# Altium PCB pokey-switch-board.PcbDoc
Units mil, origin at the board's own origin, x right, y up, seen from the top; angles counter-clockwise.
Board outline 700 x 2425 mil, 2 copper layers (Top Layer, Bottom Layer), stack 62.8 mil thick; 10 components, 8 nets, 35 pads, 4 vias.
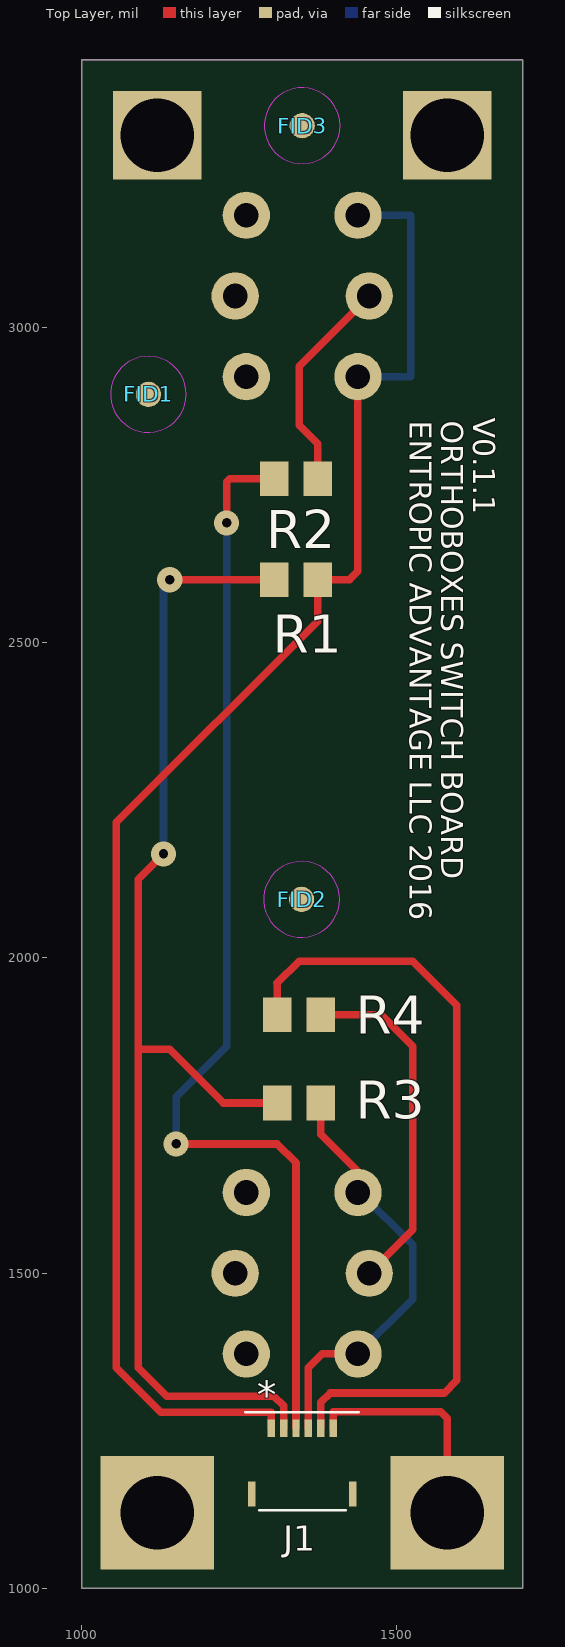
[diagram p0: Top Layer view]
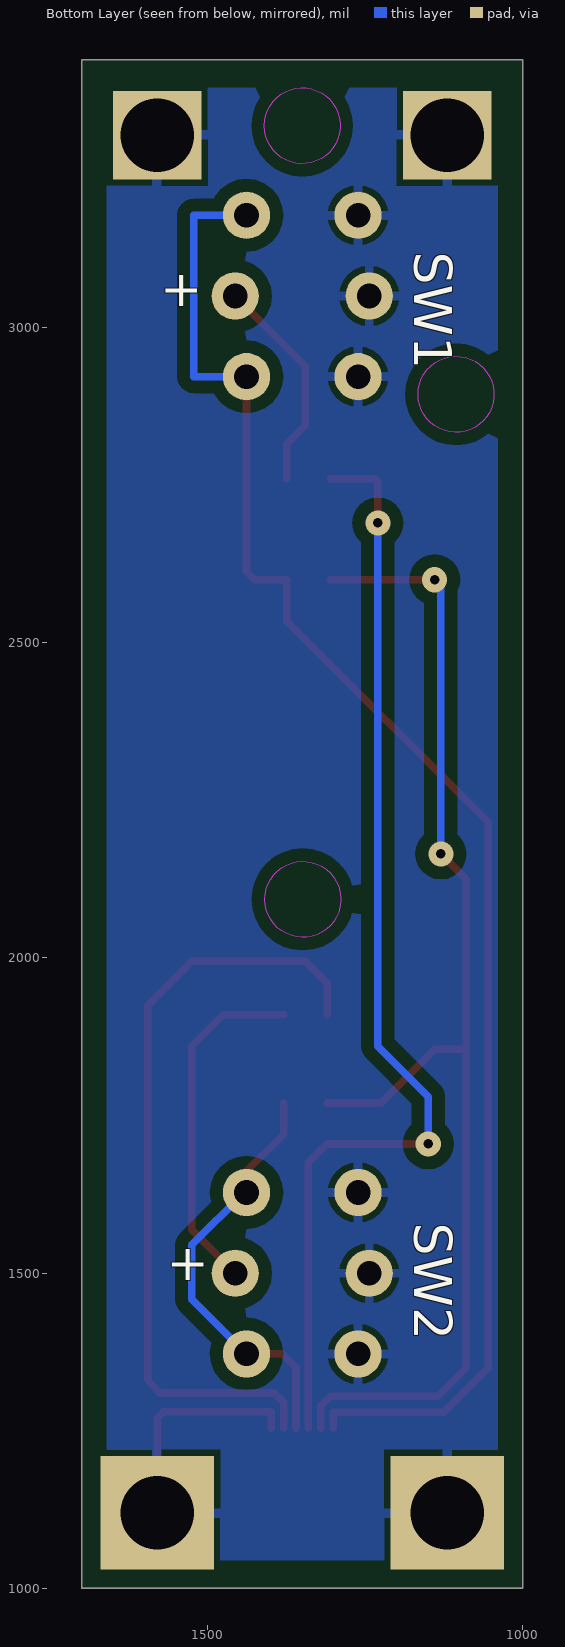
[diagram p1: Bottom Layer view, seen from below]
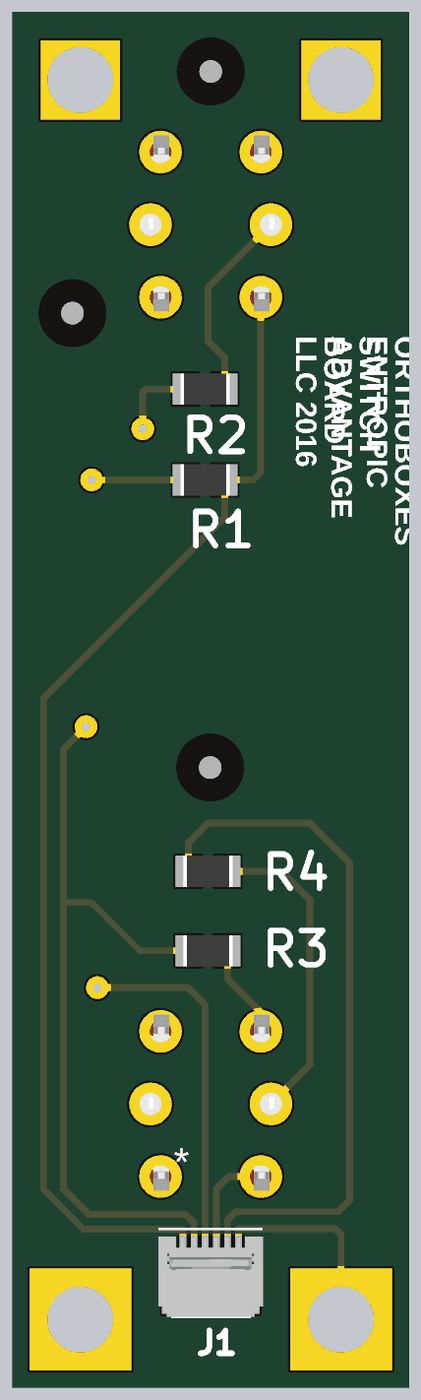
[diagram p2: 3D render of the assembled board from above, using the file's embedded part models]

## Layer stack, top to bottom
Top Solder: solder mask 1, Solder Resist, Dk 3.5
Top Layer: signal copper 1.4
Dielectric 1: dielectric 60, FR-4, Dk 4.6
Bottom Layer: signal copper 1.4
Bottom Solder: solder mask 1, Solder Resist, Dk 3.5

## Board outline
1000,1000 1700,1000 1700,3425 1000,3425

## Design rules (kind name [scope] priority, off if disabled: settings)
BoardOutlineClearance [All] p1: gap=30
Clearance [All] p1: gap=6 except(10: SMDPad-Via THPad-Via Via-Via; 20: Arc-Poly Track-Poly SMDPad-Poly THPad-Poly Via-Poly Fill-Poly Poly-Poly)
ComponentClearance [All] p1: gap=50 collisioncheckmode=3 verticalgap=100 showdistances=TRUE
DiffPairsRouting [All] p1: maxlimit=10 minlimit=10 mostfreqgap=10 toplayer_minwidth=8 toplayer_maxwidth=15 toplayer_prefwidth=8 bottomlayer_minwidth=8 bottomlayer_maxwidth=15 bottomlayer_prefwidth=8 maxuncoupledlength=500
HoleSize [All] p1: absolutevalues=TRUE maxlimit=235 minlimit=13 maxpercent=80.000 minpercent=20.000
MinimumAnnularRing [All] p1: minimumring=7
MinimumSolderMaskSliver [All] p1: minsoldermaskwidth=4
PlaneClearance [All] p1: clearance=30
PlaneConnect [All] p1: planeconnectstyle=Relief reliefexpansion=20 reliefentries=4 reliefconductorwidth=15 reliefairgap=10
PolygonConnect [All] p1: connectstyle=Relief reliefconductorwidth=15 reliefentries=4 polygonreliefangle="90 Angle" airgapwidth=10
RoutingVias [All] p1: holewidth=15 width=30 viastyle="Through Hole" minholewidth=10 minwidth=15 maxholewidth=40 maxwidth=50
SilkToSilkClearance [All] p1: silktosilkclearance=4
SilkToSolderMaskClearance [IsPad] p1: minsilkscreentomaskgap=5 clearancetoexposedcopper=TRUE
SolderMaskExpansion [All] p1: expansion=4
Width [InNetClass('All Nets')] p1: maxlimit=30 minlimit=8 preferedwidth=10 minimp=50.000000 maximp=50.000000 favimp=50.000000
22 further rules are at their usual default settings.

## Components (designator, comment, footprint, x,y, rotation, side; value= is the part's Value field where it differs from the comment)
FID1 "FIDUCIAL" FID 1106,2894 r0 top
FID2 "FIDUCIAL" FID 1349,2093 r90 top
FID3 "FIDUCIAL" FID 1350,3320 r90 top
J1 "5034800600" "MOLEX 503480-0600" 1269.68,1149.68 r0 top locked
R1 "10k" RESC2012X07N_SAMSUNG 1340,2600 r180 top
R2 "100R" RESC2012X07N_SAMSUNG 1340,2760 r180 top
R3 "10k" RESC2012X07N_SAMSUNG 1345,1770 r180 top
R4 "100R" RESC2012X07N_SAMSUNG 1345,1910 r180 top
SW1 "TL1240GQ1JCLR" TL1240 1261.4,2922 r90 bottom locked
SW2 "TL1240GQ1JCLR" TL1240 1261.4,1372 r90 bottom locked

## Footprints (in the part's own frame and the unit in brackets; to place one, negate y for a bottom-side part, rotate by r counter-clockwise, add the part's x,y. Pads: shape width x height; smd on the part's side, far side on the other; paste and mask are expansions set on the pad)
FID [mil] "FIDUCIAL"
  round 40 smd paste+0 mask+40: 0(0,0)
  Keep-Out Layer circle w1: c0,0 r60.21
"MOLEX 503480-0600" [mm] "MOLEX FFC Connector 6pos"
  rect 0.3x0.7 smd: 1(0.79,2.65) 2(1.29,2.65) 3(1.79,2.65) 4(2.29,2.65) 5(2.79,2.65) 6(3.29,2.65)
  rect 0.3x1 smd: P1(0,0) P2(4.08,0)
  silkscreen extent -0.25,-0.65 4.32,3.3, body extent -0.32,-0.63 4.38,2.97, height 1.88
RESC2012X07N_SAMSUNG [mm] "Chip Resistor, 2-Leads, Body 2.00x1.25mm, IPC Medium Density"
  rect 1.15x1.4 smd: 1(-0.875,0) 2(0.875,0)
  body extent -1.1,-0.7 1.1,0.7, height 0.65
TL1240 [mil] "TL1240 illuminated tactile switch"
  round 75 hole 39: 1(0,0) 2(256,0) 3(256,177) 4(0,177) 5(127.95,194.88) 6(127.95,-17.72)
  body extent -26,-58 286,238, height 324

## Part data
FID1 FID2 FID3: library part "Fiducial 1"
J1: "CONN FFC FPC 6POS 0.50MM R/A"
R1 R3: library part RC2012F103CS, "RES SMD 10K OHM 1% 1/8W 0805"
R2 R4: library part RC2012F101CS, "RES SMD 100 OHM 1% 1/8W 0805"
SW1 SW2: "SWITCH TACTILE SPST-NO 0.05A 12V"

## Free pads (board coordinates)
  rect 180x180 hole 116: GND(1120,1120) GND(1580,1120)
  rect 140x140 hole 116: GND(1120,3305) GND(1580,3305)

## Via types
v1: diameter 40, hole 15, Top Layer to Bottom Layer, 4 vias

## Nets (pads, with @x,y where several pads share a name; then routed paths per layer and width w, separated by ;. In a path a pad name is that pad's centre, name@x,y a point inside that pad or via, vN(x,y) a via of type N, cw(c..) or ccw(c..) an arc to the next point about the centre after c; other vN are vias at no path point)
+5V: J1.2 R1.2 R3.2 | length 1983.1
  Top Layer w12: v1(1130,2165) 1090,2125 1090,1855 ; v1(1140,2600) R1.2 ; R3.2 1225,1770 1140,1855 1090,1855 ; J1.2 1320.47,1289.53 1305,1305 1135,1305 1090,1350 1090,1855
  Bottom Layer w12: v1(1130,2165) 1130,2590 v1(1140,2600)
GND: J1.6 pad.GND SW1.1 SW1.2 SW1.6 SW2.1 SW2.2 SW2.6 | length 360.9
  Top Layer w12: J1.6 1399.21,1280 1570,1280 1580,1270 pad.GND@1580,1120
NetJ1_1: J1.1 R1.1 SW1.3 SW1.4 | length 2483.9
  Top Layer w12: J1.1 1300.79,1279.21 1125.79,1279.21 1055,1350 1055,2215 1374.45,2534.45 R1.1 1425,2600 1438.4,2613.4 SW1.4
  Bottom Layer w12: SW1.4 1522,2922 1522,3178 SW1.3
NetJ1_3: J1.3 R2.2 | length 1784.2
  Top Layer w12: v1(1150,1705) 1310,1705 1340.16,1674.84 J1.3 ; v1(1230,2690) 1230,2755 1235,2760 R2.2
  Bottom Layer w12: v1(1150,1705) 1150,1780 1230,1860 v1(1230,2690)
NetJ1_4: J1.4 R3.1 SW2.3 SW2.4 | length 679.8
  Top Layer w12: J1.4 1359.84,1349.84 1382,1372 SW2.4 ; R3.1 1379.45,1720.55 1438.4,1661.6 SW2.3
  Bottom Layer w12: SW2.4 1525,1458.6 1525,1545 1442,1628 SW2.3
NetJ1_5: J1.5 R4.2 | length 1244.7
  Top Layer w12: R4.2 1310.55,1959.45 1310,1960 1345,1995 1525,1995 1595,1925 1595,1330 1575,1310 1394.53,1310 1379.53,1295 J1.5
NetR2_1: R2.1 SW1.5 | length 348.2
  Top Layer w12: R2.1 1374.45,2815.55 1345,2845 1345,2938.67 SW1.5
NetR4_1: R4.1 SW2.5 | length 554.8
  Top Layer w12: R4.1 1475,1910 1525,1860 1525,1568.67 SW2.5
pads on no net: FID1.0 FID2.0 FID3.0 J1.P1 J1.P2

## Polygon pours and split planes (outlines as drawn)
GND on Bottom Layer "GND" (solid, remove dead copper, pour order 4): 1040,1045 1660,1045 1660,3380 1040,3380

## Keep-outs
Keep-Out Layer:
  the board outline again, w1

## Silkscreen, mask and mechanical layers (free items; w line width, h text height)
Top Overlay:
  text "V0.1.1" at 1609,2857 h59.06 r270
  text "ENTROPIC ADVANTAGE LLC 2016" at 1509,2852 h59.06 r270
  text "ORTHOBOXES SWITCH BOARD" at 1559,2852 h59.06 r270
Bottom Overlay:
  text "+" at 1575,3015 h100
  text "+" at 1565,1470 h100

## Text inside footprints (layer, text, board x,y; h text height)
J1: Top Overlay "*" at 1310,1270 h78.74